# EAGLE board leds (EAGLE 7.4.0)
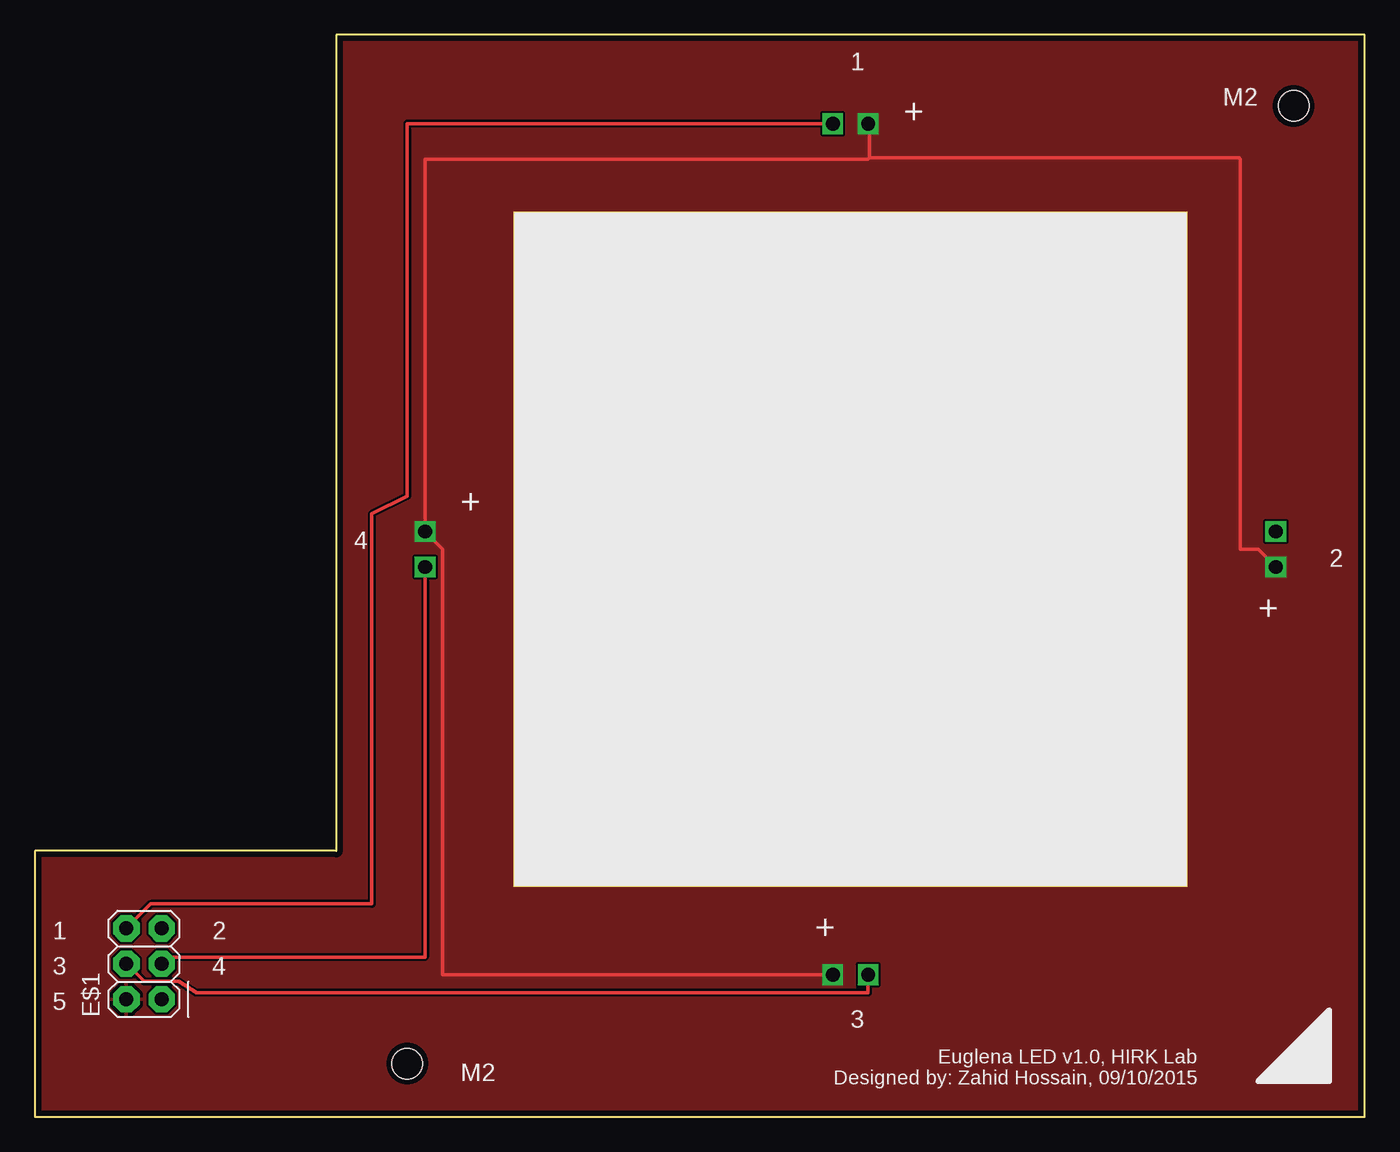
[diagram p0: board, top side]
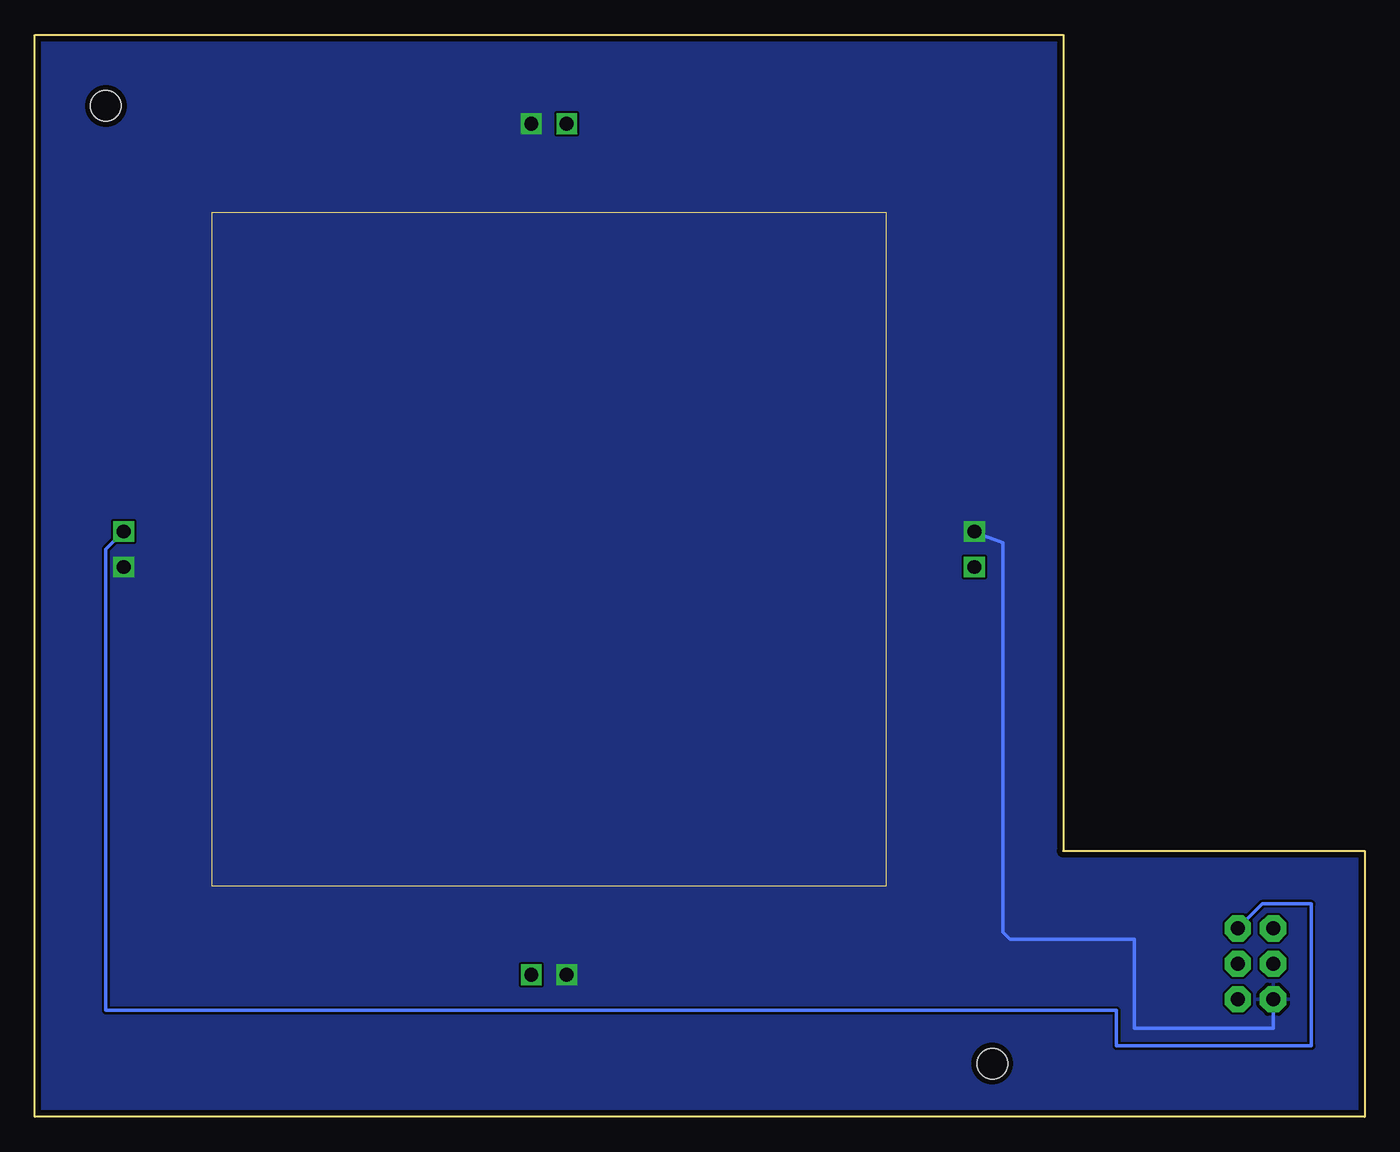
[diagram p1: board, bottom side, seen from below]

Size 95.25 x 77.47 mm. Coordinates in mm from the lower left corner, seen from the top.
Outline: 0,0 95.25,0 95.25,77.47 21.59,77.47 21.59,19.05 0,19.05 0,0
Copper layers (1*16): Top 0.035559375mm / dielectric 1.501140625mm / Bottom 0.035559375mm
Design rules "4pcb": minimum track width 10mil, minimum drill 15mil, track to track 6mil, track to pad 6mil, pad to pad 6mil, via to via 6mil, smd to smd 6mil, copper to edge 15mil, drill to drill 8mil, minimum pad ring 10mil, minimum via ring 8mil, stop-mask expansion 4mil, vias tented up to drill 0mil, thermal gap 10mil
Holes 2.2 mm at 26.67,3.81 90.17,72.39
Milling: area 34.3,16.5 to 82.6,64.8

## Footprints (pad centres in the part's own frame; a part is rotated, then mirrored left to right if it is on the bottom)
2X03 = drill 1.016 pad 1.88 octagon: 1 -2.54,-1.27; 2 -2.54,1.27; 3 0,-1.27; 4 0,1.27; 5 2.54,-1.27; 6 2.54,1.27

## Placement (x,y rotation side)
E$1  [2X03]  7.82,10.95 90 top

## Library data of the parts
E$1 = SparkFun-Connectors

## Nets
1: E$1.6
2: E$1.5
3: E$1.4
4: E$1.3
VCC: E$1.2

## Tracks (layer width: path | path; a pad name or v marks a point on that pad's centre or on a via)
1  (via drill 1)
  Top 0.254: 6.6,13.51 E$1.6 8.3,15.24 24.13,15.24 24.13,43.18 26.67,44.45 26.67,71.12 v57.15,71.12
2  (via drill 1)
  Bottom 0.254: E$1.5 7.34,15.24 3.81,15.24 3.81,5.08 17.78,5.08 17.78,7.62 90.17,7.62 90.17,40.64 v88.9,41.91
3  (via drill 1)
  Top 0.254: E$1.4 6.6,10.92 7.82,9.7 10.31,9.7 11.58,8.89 59.69,8.89 v59.69,10.16
4  (via drill 1)
  Top 0.254: 9.2,11.07 E$1.3 9.57,11.43 27.94,11.43 v27.94,39.37
VCC  (via drill 1)
  Top 0.254: 27.94,41.86 v27.94,41.91 | 88.9,39.27 v88.9,39.37 87.63,40.64 86.36,40.64 86.36,68.58 86.26,68.68 59.79,68.68 | v59.69,71.12 59.79,71.12 59.79,68.68 | v57.15,10.16 29.21,10.16 29.21,40.64 v27.94,41.91 | 59.79,68.68 59.69,68.58 27.94,68.58 v27.94,41.91
  Bottom 0.254: v27.94,41.91 27.94,41.86 25.91,41.1 25.91,13.21 25.4,12.7 16.51,12.7 16.51,6.35 6.55,6.35 E$1.2
  pour Top: -5.08,81.28 -5.08,-2.54 99.06,-2.54 100.33,-2.54 100.33,81.28
  pour Bottom: -1.27,78.74 -1.27,-1.27 96.52,-1.27 96.52,81.28 -1.27,81.28

## Text on the board
tPlace: 1 | M2 | + | + | 4 | 2 | + | 1 | 2 | + | 3 | 4 | 5 | 3 | Euglena LED v1.0, HIRK Lab / Designed by: Zahid Hossain, 09/10/2015 | M2